# EAGLE board esp32-driver_Rizqulloh (EAGLE 9.6.2)
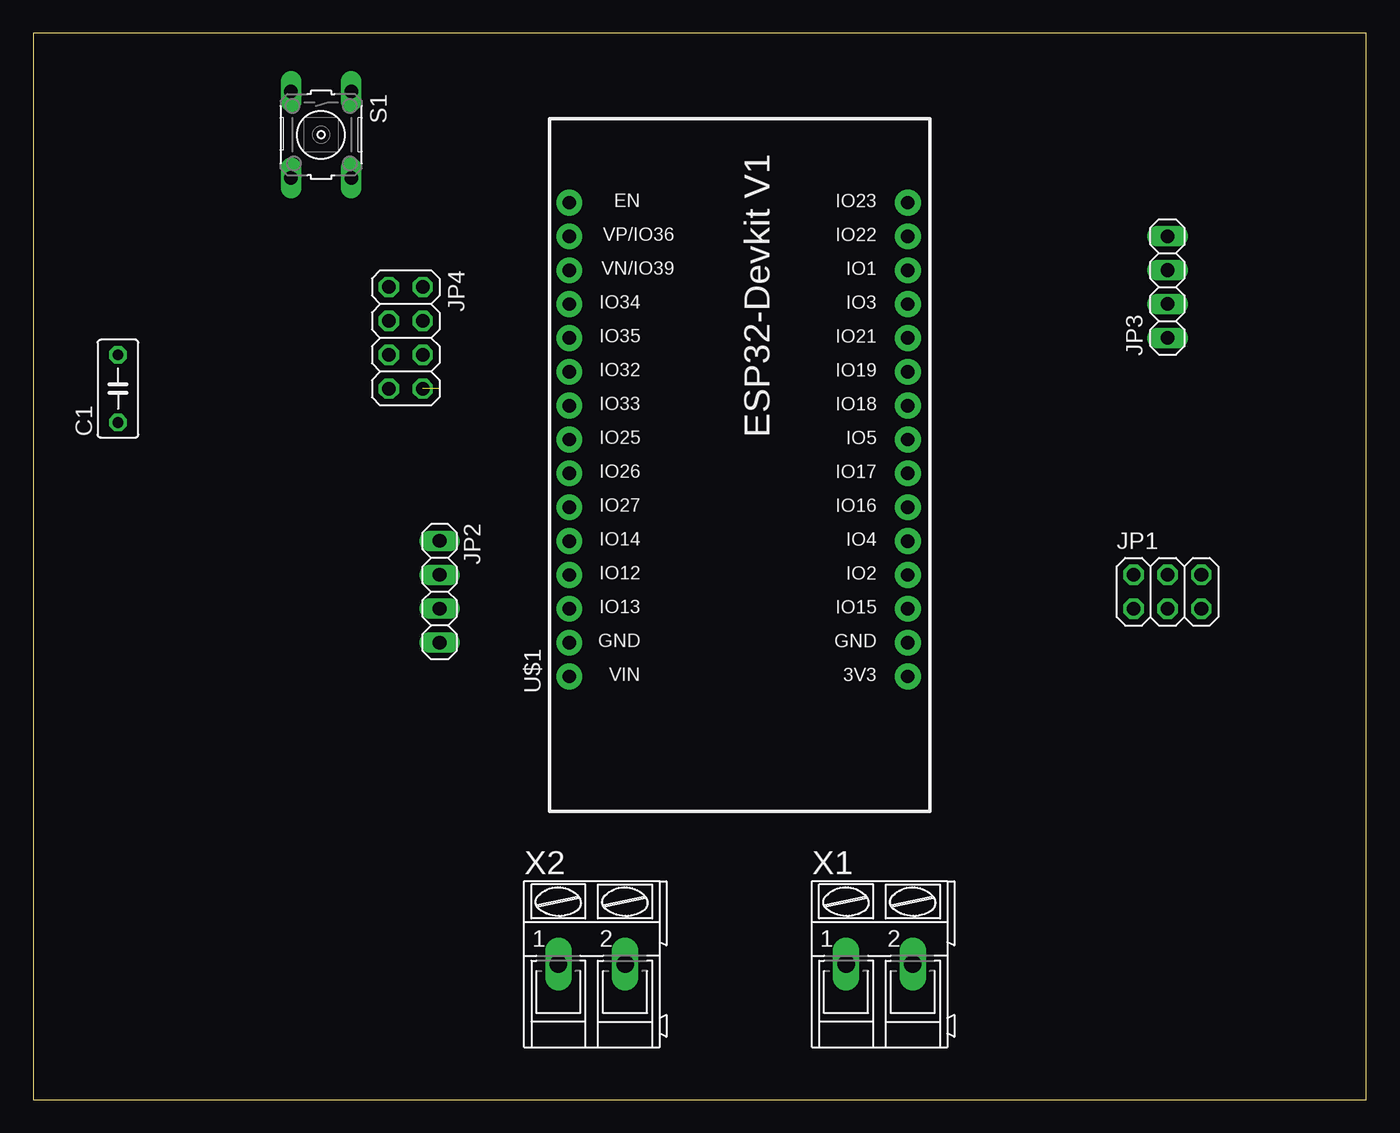
[diagram p0: board, top side]
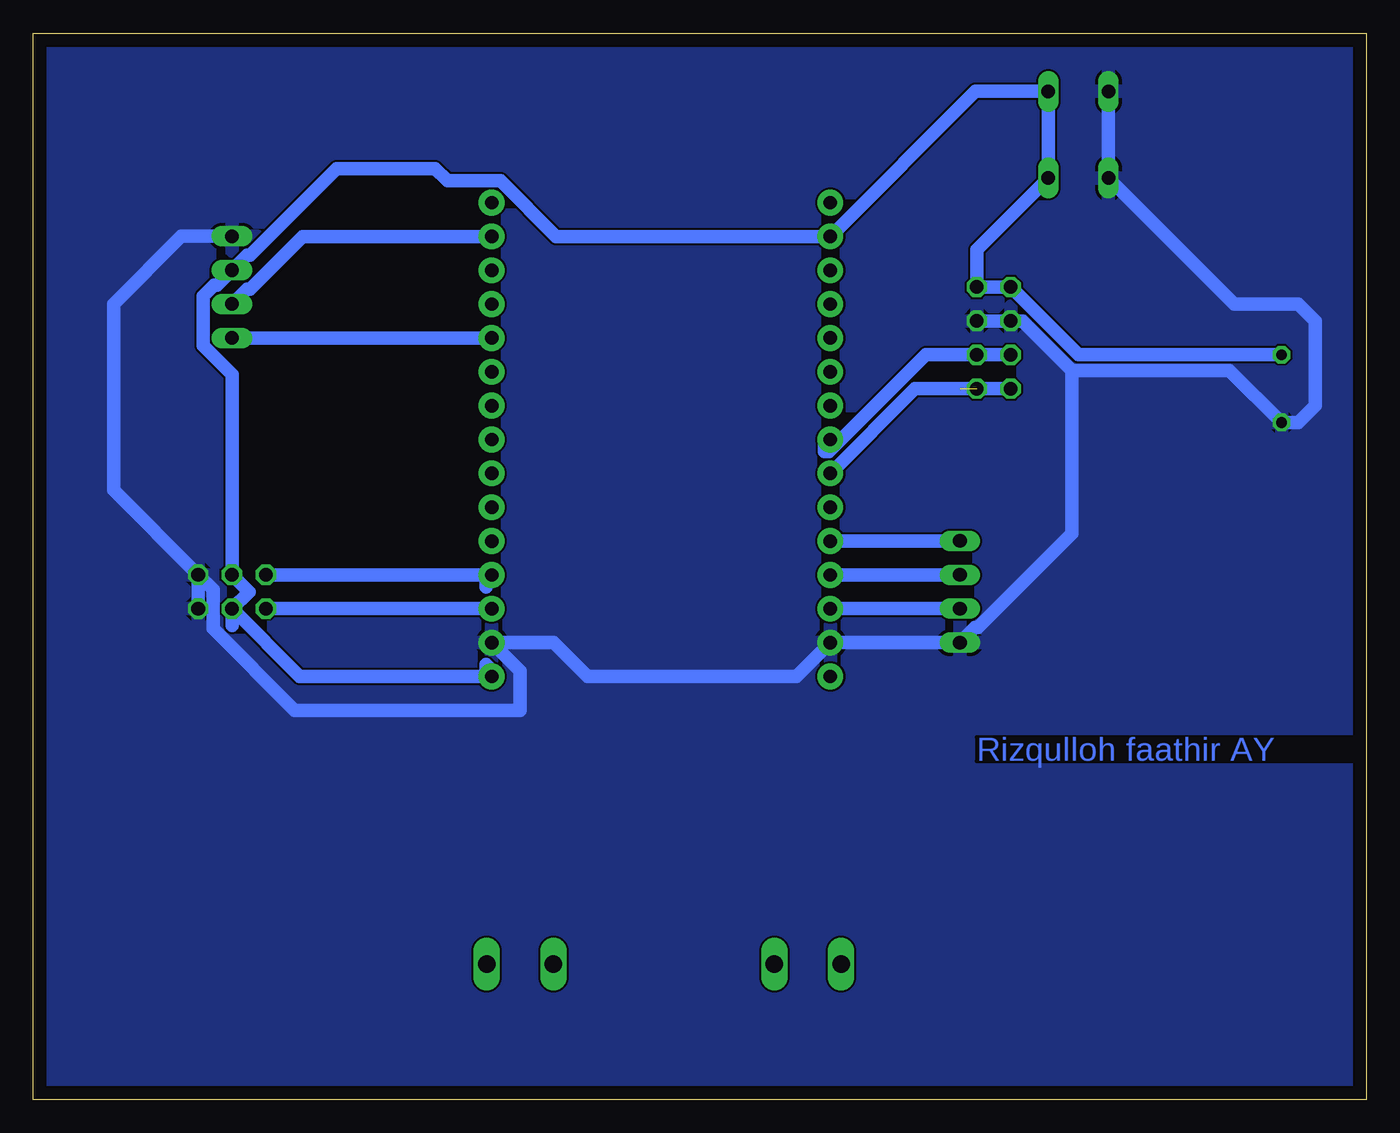
[diagram p1: board, bottom side, seen from below]

Size 100 x 80 mm. Coordinates in mm from the lower left corner, seen from the top.
Outline: 0,0 100,0 100,80 0,80 0,0
Copper layers (1*16): Top 0.035mm / dielectric 1.5mm / Bottom 0.035mm
Design rules "default": minimum track width 6mil, minimum drill 0.35mm, track to track 6mil, track to pad 6mil, pad to pad 6mil, via to via 6mil, smd to smd 6mil, copper to edge 40mil, drill to drill 6mil, minimum pad ring 10mil, minimum via ring 8mil, stop-mask expansion 4mil, vias tented up to drill 0mil, thermal gap 10mil

## Footprints (pad centres in the part's own frame; a part is rotated, then mirrored left to right if it is on the bottom)
C050-030X075 = drill 0.813 octagon: 1 -2.54,0; 2 2.54,0
2X03 = drill 1.016 octagon: 1 -2.54,-1.27; 2 -2.54,1.27; 3 0,-1.27; 4 0,1.27; 5 2.54,-1.27; 6 2.54,1.27
1X04 = drill 1.016 long: 1 -3.81,0; 2 -1.27,0; 3 1.27,0; 4 3.81,0
2X04 = drill 1.016 octagon: 1 -3.81,-1.27; 2 -3.81,1.27; 3 -1.27,-1.27; 4 -1.27,1.27; 5 1.27,-1.27; 6 1.27,1.27; 7 3.81,-1.27; 8 3.81,1.27
B3F-10XX = drill 1.016 long: 1 -3.251,2.261; 2 3.251,2.261; 3 -3.251,-2.261; 4 3.251,-2.261
ESP32-DEVKITV1 = drill 1 pad 1.93: 3V3 -16.52,-12.27; D1 13.96,-12.27; D2 -8.9,-12.27; D3 11.42,-12.27; D4 -6.36,-12.27; D5 1.26,-12.27; D12 -8.9,13.135; D13 -11.44,13.135; D14 -6.36,13.135; D15 -11.44,-12.27; D16 -3.82,-12.27; D17 -1.28,-12.27; D18 3.8,-12.27; D19 6.34,-12.27; D21 8.88,-12.27; D22 16.5,-12.27; D23 19.04,-12.27; D25 1.26,13.135; D26 -1.28,13.135; D27 -3.82,13.135; D32 6.34,13.135; D33 3.8,13.135; D34 11.42,13.135; D35 8.88,13.135; D36 16.5,13.135; D39 13.96,13.135; EN 19.04,13.135; GND@1 -13.98,13.135; GND@2 -13.98,-12.27; VIN -16.52,13.135
AK300/2 = drill 1.321 long: 1 -2.515,0; 2 2.489,0

## Placement (x,y rotation side)
C1  [C050-030X075]  6.35,53.34 90 top
JP1  [2X03]  85.09,38.1 0 top
JP2  [1X04]  30.48,38.1 270 top
JP3  [1X04]  85.09,60.96 90 top
JP4  [2X04]  27.94,57.15 270 top
S1  [B3F-10XX]  21.59,72.39 270 top
U$1  ESP32DEVKITV1  [ESP32-DEVKITV1]  53.34,48.26 90 top
X1  [AK300/2]  63.5,10.16 0 top
X2  [AK300/2]  41.91,10.16 0 top

## Library data of the parts
C1 = rcl; SPICEPREFIX: C
JP1-JP4 = pinhead
S1 = switch-omron; MPN: B3F-1000; OC_FARNELL: 176432; OC_NEWARK: 36M3542
U$1 = esp32-devkitv1
X1 X2 = con-ptr500; OC_FARNELL: unknown; OC_NEWARK: unknown

## Nets
GND: C1.1 JP1.5 JP1.6 JP2.4 JP3.4 JP4.3 JP4.4 S1.3 S1.4 U$1.GND@1 U$1.GND@2
MOISTURE: JP1.2 U$1.D2
OUT1: JP2.1 U$1.D14
OUT2: JP2.2 U$1.D12
OUT3: JP2.3 U$1.D13
PH: JP1.1 U$1.D15
SCL: JP3.2 U$1.D22
SCL2: JP4.5 JP4.6 U$1.D25
SDA: JP3.1 U$1.D21
SDA2: JP4.7 JP4.8 U$1.D26
V: C1.2 JP1.3 JP1.4 JP3.3 JP4.1 JP4.2 S1.1 S1.2 U$1.3V3 U$1.D36
VIN: U$1.VIN

## Tracks (layer width: path | path; a pad name or v marks a point on that pad's centre or on a via)
GND
  Bottom 1.016: JP1.5 JP1.6 | JP1.6 93.98,45.72 93.98,59.69 88.9,64.77 JP3.4 | JP1.6 86.51,38.25 86.51,35.33 80.39,29.21 63.5,29.21 63.5,32.17 U$1.GND@2 60.96,34.29 58.42,31.75 42.73,31.75 U$1.GND@1 40.2,34.29 JP2.4 29.36,35.41 29.13,35.41 22.07,42.46 22.07,54.71 | S1.3 S1.4 9.88,59.69 5.08,59.69 3.81,58.42 3.81,52.07 5.08,50.8 C1.1 10.26,54.71 22.07,54.71 | 22.07,54.71 25.78,58.42 JP4.3 JP4.4
  pour Bottom: 0,80.01 100.33,80.01 100.33,0 0,0
MOISTURE
  Bottom 1.016: 66.04,38.45 66.04,39.37 | 66.04,39.37 U$1.D2 | JP1.2 66.04,39.37
OUT1
  Bottom 1.016: JP2.1 40.64,41.91 40.63,41.9 U$1.D14
OUT2
  Bottom 1.016: JP2.2 40.2,39.37 U$1.D12
OUT3
  Bottom 1.016: JP2.3 40.2,36.83 U$1.D13
PH
  Bottom 1.016: JP1.1 U$1.D15
SCL
  Bottom 1.016: JP3.2 83.97,60.81 83.74,60.81 79.79,64.76 U$1.D22
SCL2
  Bottom 1.016: JP4.5 JP4.6 33.02,55.88 40.29,48.61 40.64,48.61 40.64,49.09 U$1.D25
SDA
  Bottom 1.016: U$1.D21 JP3.1
SDA2  (1 unrouted)
  Bottom 1.016: 30.48,53.34 JP4.7 | JP4.8 33.84,53.34 U$1.D26
V
  Bottom 1.016: JP1.3 83.82,38.1 JP1.4 85.09,54.38 87.27,56.56 87.27,60.28 86.44,61.11 86.21,61.11 JP3.3 83.97,63.35 83.74,63.35 77.24,69.85 69.85,69.85 68.93,68.93 64.94,68.93 60.77,64.76 U$1.D36 29.32,75.64 S1.1 S1.2 29.21,63.78 JP4.2 JP4.1 21.59,55.88 C1.2 | 85.09,35.56 JP1.3 | JP1.3 80.01,31.75 66.04,31.75 66.04,32.65 65.61,32.22 U$1.3V3

## Text on the board
Bottom: Rizqulloh faathir AY